# Altium PCB 智慧景区导航.PcbDoc
Units mm, origin at the board's own origin, x right, y up, seen from the top; angles counter-clockwise.
Board outline 94.01 x 87.28 mm, 2 copper layers (Top Layer, Bottom Layer); 20 components, 27 nets, 101 pads, 0 vias.
Unrouted connection lines stored in the file: 52.
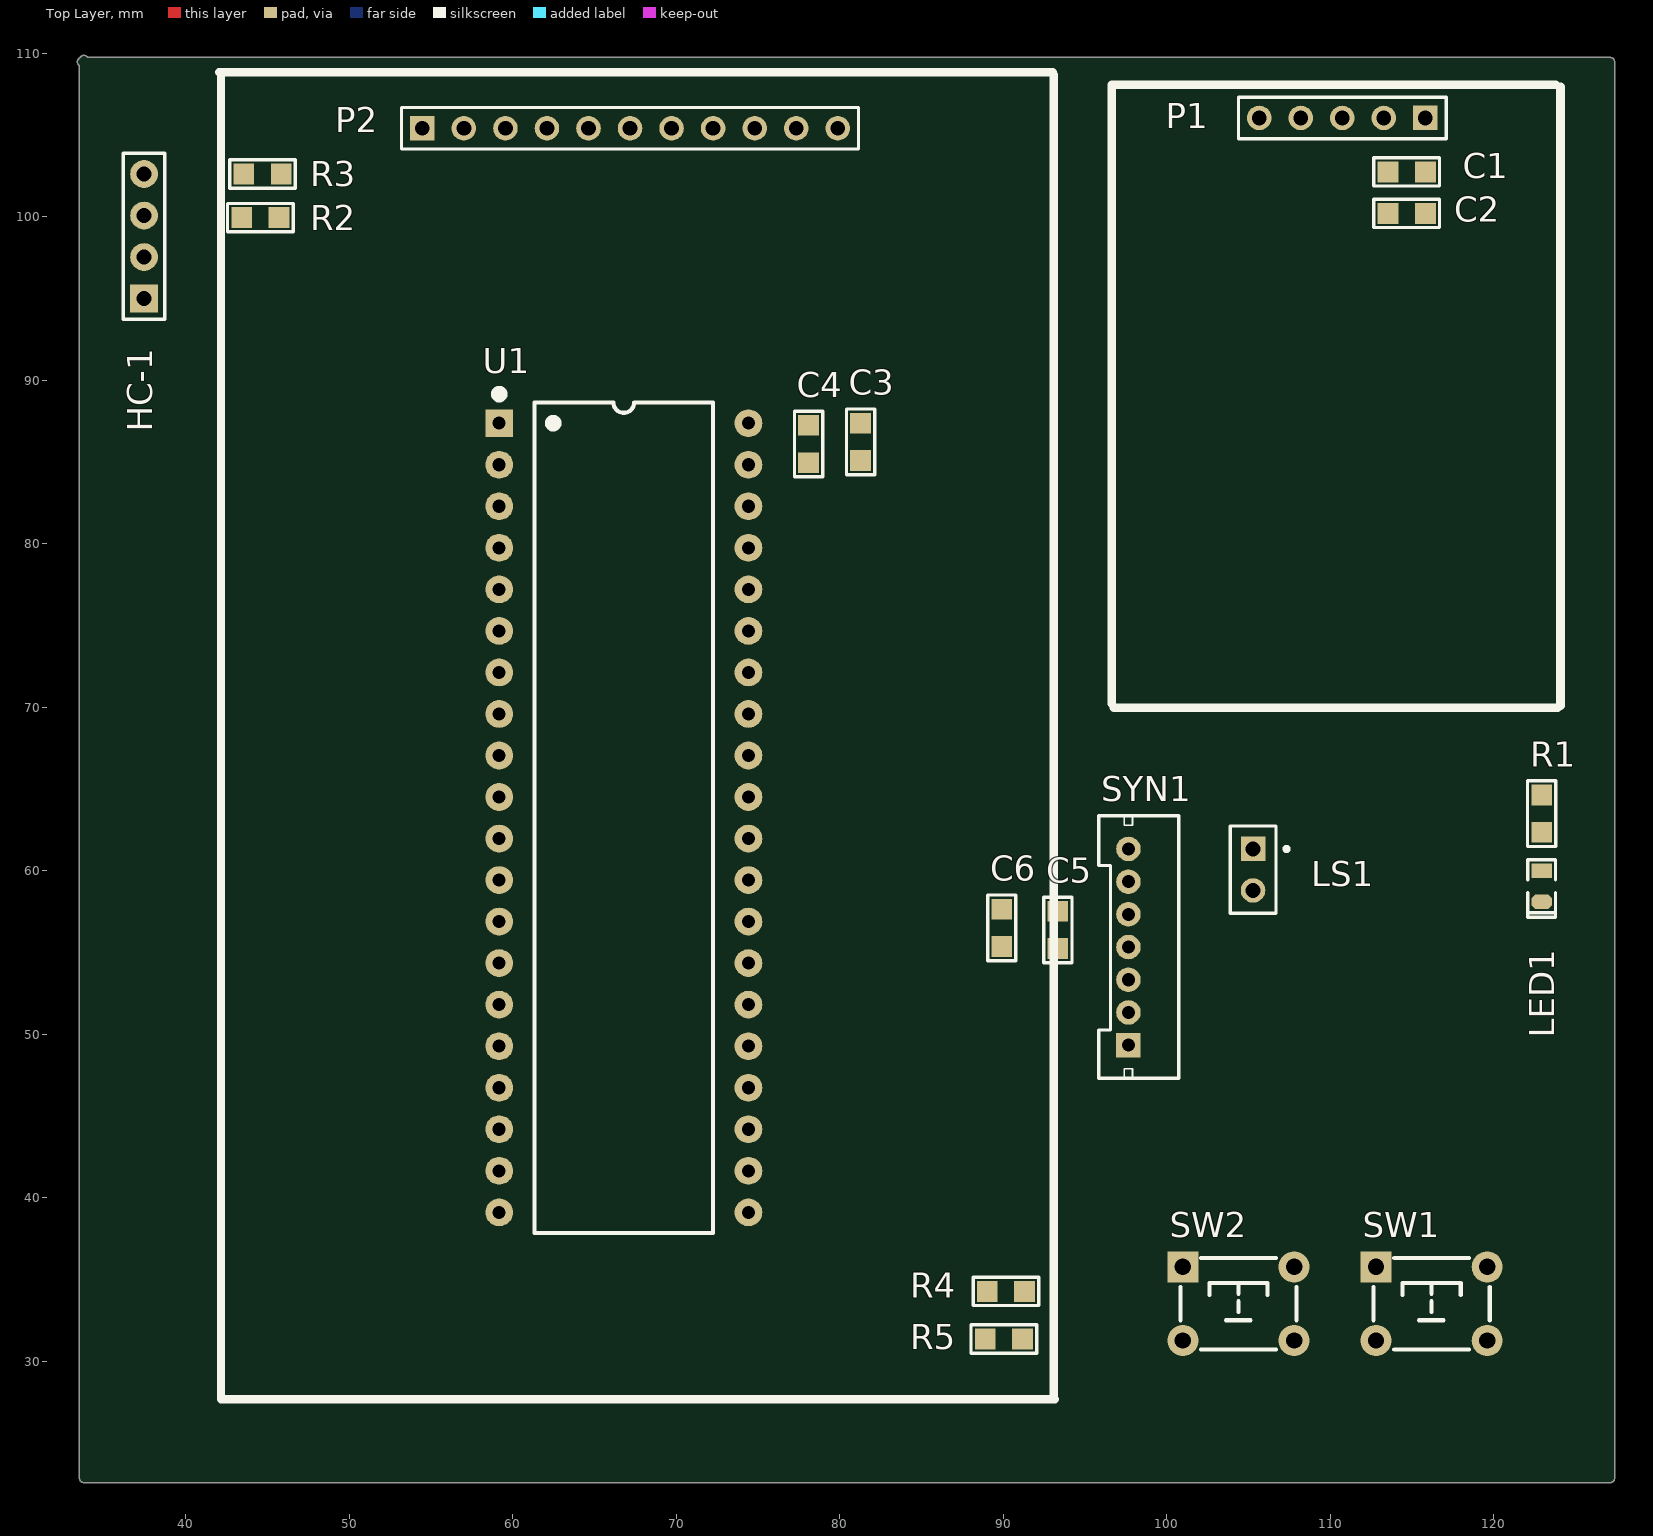
[diagram p0: Top Layer view]
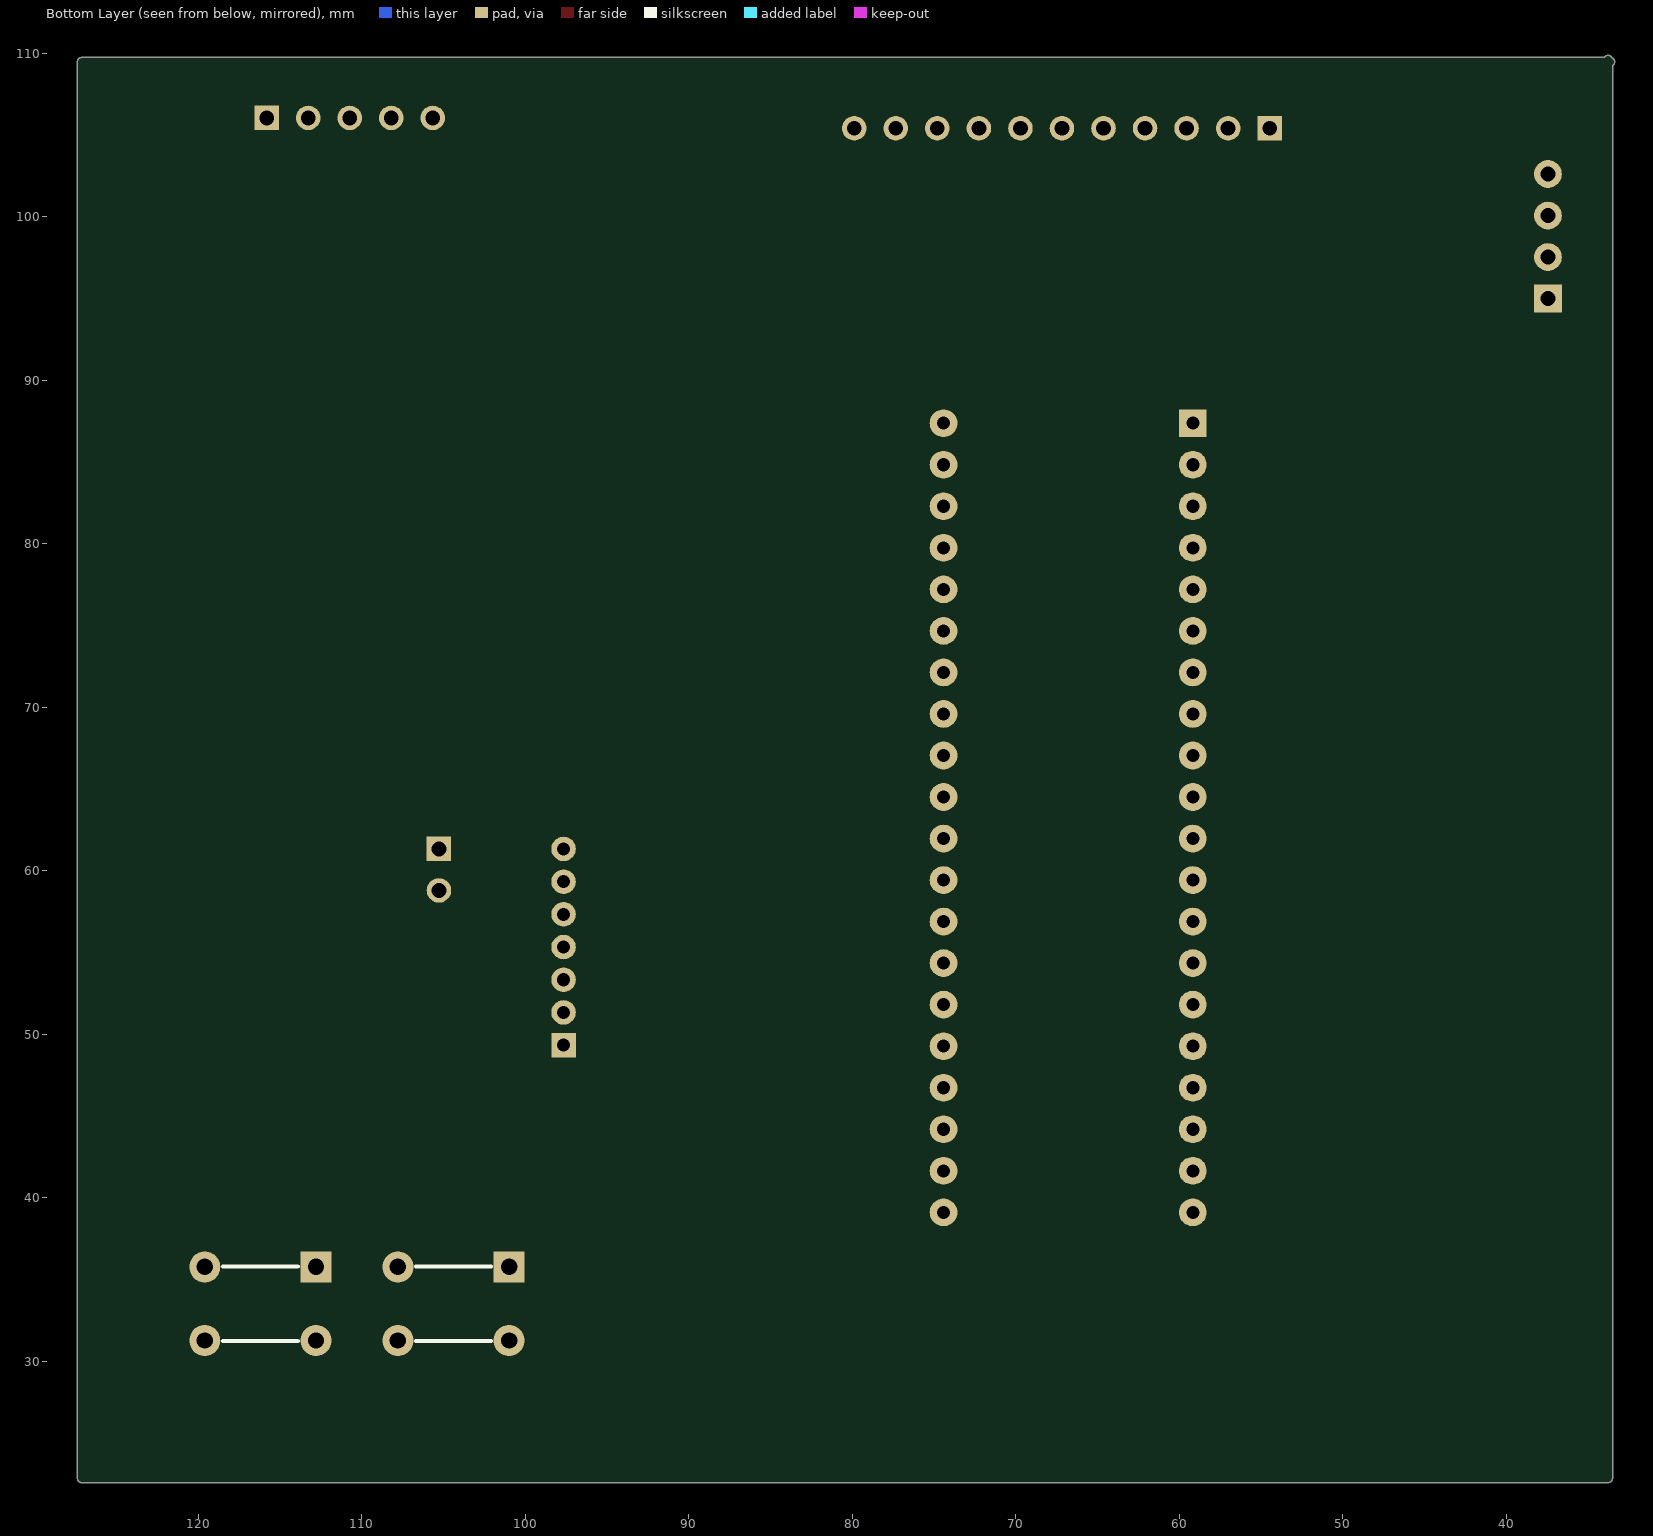
[diagram p1: Bottom Layer view, seen from below]

## Layer stack, top to bottom
Top Solder: solder mask 0.0102, Solder Resist, Dk 3.5
Top Layer: signal copper 0.0356
Dielectric 1: dielectric 0.32, FR-4, Dk 4.8
Bottom Layer: signal copper 0.0356
Bottom Solder: solder mask 0.0102, Solder Resist, Dk 3.5

## Board outline
33.512,22.86 33.512,109.245 cw(c33.655,109.474) 33.538,109.718 cw(c33.782,109.601) 34.011,109.744 127.127,109.744 cw(c127.127,109.474) 127.397,109.474 127.397,22.86 cw(c127.127,22.86) 127.127,22.59 33.782,22.59 cw(c33.782,22.86)

## Design rules (kind name [scope] priority, off if disabled: settings)
Clearance Clearance_GND [InPolygon] p1: gap=0.5 ignorepadtopadclearanceinfootprint=TRUE
Clearance [All] p2: gap=0.203 ignorepadtopadclearanceinfootprint=TRUE
HoleSize [All] p1: absolutevalues=TRUE maxlimit=3.54 minlimit=0.2 maxpercent=80.000 minpercent=20.000
PolygonConnect [All] p1: connectstyle=Relief reliefconductorwidth=0.254 reliefentries=4 polygonreliefangle="90 Angle" airgapwidth=0.254
RoutingVias [All] p1: holewidth=0.711 width=1.27 viastyle="Through Hole" minholewidth=0.711 minwidth=1.27 maxholewidth=0.711 maxwidth=1.27
SolderMaskExpansion [All] p1: expansion=0.102
Width [All] p1: maxlimit=3.54 minlimit=0.5 preferedwidth=0.7
29 further rules are at their usual default settings.

## Components (designator, comment, footprint, x,y, rotation, side; value= is the part's Value field where it differs from the comment)
C1 "10uf" "R 0805_M" 114.681,102.743 r180 top
C2 "103" "R 0805_M" 114.681,100.203 r180 top
C3 "10uf" "R 0805_M" 81.28,86.233 r270 top
C4 "103" "R 0805_M" 78.105,86.106 r270 top
C5 "10uf" "R 0805_M" 93.345,56.388 r270 top
C6 "103" "R 0805_M" 89.916,56.515 r270 top
HC-1 "HDR-1X4" HDR2.54-M-LI-4P 37.465,98.806 r90 top
LED1 "红色" "LED 0805R" 122.936,59.055 r270 top
LS1 "Speaker" PIN2 105.283,61.341 r270 top
P1 "NEO APM" HDR1X5 115.824,106.045 r180 top
P2 "TFT2.8" HDR1X11 54.483,105.41 r0 top
R1 "510R" "R 0805_M" 122.936,63.5 r90 top
R2 "100" "R 0805_M" 44.577,99.949 r0 top
R3 "100" "R 0805_M" 44.704,102.616 r0 top
R4 "10K" "R 0805_M" 90.17,34.282 r180 top
R5 "10K" "R 0805_M" 90.043,31.369 r180 top
SW1 "6x6x5" "TSW DIP-6*6*6" 116.205,33.528 r0 top
SW2 "6x6x5" "TSW DIP-6*6*6" 104.394,33.528 r0 top
SYN1 "HDR-1X7" PH2.0-LI-7P 97.663,55.34 r90 top
U1 "STM32F103C8T6核心板" DIP40-600_MH 66.802,63.246 r0 top

## Footprints (in the part's own frame and the unit in brackets; to place one, negate y for a bottom-side part, rotate by r counter-clockwise, add the part's x,y. Pads: shape width x height; smd on the part's side, far side on the other; paste and mask are expansions set on the pad)
DIP40-600_MH [mm] "带底座 52*15.2*4mm(长宽高)"
  rect 1.7x1.7 hole 0.8: 1(-7.62,24.13)
  round 1.7 hole 0.8: 2(-7.62,21.59) 3(-7.62,19.05) 4(-7.62,16.51) 5(-7.62,13.97) 6(-7.62,11.43) 7(-7.62,8.89) 8(-7.62,6.35) 9(-7.62,3.81) 10(-7.62,1.27) 11(-7.62,-1.27) 12(-7.62,-3.81) 13(-7.62,-6.35) 14(-7.62,-8.89) 15(-7.62,-11.43) 16(-7.62,-13.97) 17(-7.62,-16.51) 18(-7.62,-19.05) 19(-7.62,-21.59) 20(-7.62,-24.13) 21(7.62,-24.13) 22(7.62,-21.59) 23(7.62,-19.05) 24(7.62,-16.51) 25(7.62,-13.97) 26(7.62,-11.43) 27(7.62,-8.89) 28(7.62,-6.35) 29(7.62,-3.81) 30(7.62,-1.27) 31(7.62,1.27) 32(7.62,3.81) 33(7.62,6.35) 34(7.62,8.89) 35(7.62,11.43) 36(7.62,13.97) 37(7.62,16.51) 38(7.62,19.05) 39(7.62,21.59) 40(7.62,24.13)
  silkscreen extent -7.87,-25.4 5.46,26.16, body extent -8.9,-26.18 8.9,26.18, height 8.3
HDR1X5 [mm] "Connector; Header; 5 Position"
  rect 1.5x1.5 hole 0.9: 1(0,0)
  round 1.5 hole 0.9: 2(2.54,0) 3(5.08,0) 4(7.62,0) 5(10.16,0)
  silkscreen extent -1.27,-1.27 11.43,1.27
HDR1X11 [mm] "Connector; Header; 11 Position"
  rect 1.5x1.5 hole 0.9: 1(0,0)
  round 1.5 hole 0.9: 2(2.54,0) 3(5.08,0) 4(7.62,0) 5(10.16,0) 6(12.7,0) 7(15.24,0) 8(17.78,0) 9(20.32,0) 10(22.86,0) 11(25.4,0)
  silkscreen extent -1.27,-1.27 26.67,1.27
HDR2.54-M-LI-4P [mm] "排母，4脚"
  rect 1.7x1.7 hole 0.9: 1(-3.81,0)
  round 1.7 hole 0.9: 2(-1.27,0) 3(1.27,0) 4(3.81,0)
  silkscreen extent -5.08,-1.27 5.08,1.27, body extent -5.08,-1.27 5.08,1.27, height 8.5
"LED 0805R" [mil] "红色0805LED"
  rect 35x50 smd: 1(-37.41,0)
  oct 35x50 smd: 2(37.4,0)
  silkscreen extent -64,-33 75,33, body extent -39,-25 39,25, height 32
PH2.0-LI-7P [mm] "长：15.9mm，宽：4.7mm，高：6mm"
  rect 1.5x1.5 hole 0.8: 1(-6,0)
  round 1.5 hole 0.8: 2(-4,0) 3(-2,0) 4(0,0) 5(2,0) 6(4,0) 7(6,0)
  silkscreen extent -8.03,-3.08 8.03,1.82, body extent -7.95,-3 7.95,1.7, height 6.01
PIN2 [mm] "Photosensitive Diode; 2 Leads"
  rect 1.5x1.5 hole 0.9: 1(0,0)
  round 1.5 hole 0.9: 2(2.54,0)
  silkscreen extent -1.4,-1.4 3.94,2.18
"R 0805_M" [mil] "1/8W贴片电阻"
  rect 50x50 smd: 1(-45.01,-0.01) 2(45,0)
  silkscreen extent -79,-34 79,34, body extent -39,-25 39,25, height 20
"TSW DIP-6*6*6" [mm] "6*6*6mm"
  rect 1.9x1.9 hole 1: 1(-3.4,2.25)
  round 1.9 hole 1: 2(3.4,2.25) 3(-3.4,-2.25) 4(3.4,-2.25)
  silkscreen extent -3.56,-2.79 3.56,2.79, body extent -4.11,-3 4.11,3, height 5.95

## Part data
C1 C2 C3 C4 C5 C6: library part C-CC, "直插瓷片电容"
HC-1: library part "Header 4", "4P接插件"
LED1: library part LED-SMD, "贴片LED", BOM名称=贴片LED, 学习资源=www.ooocke.com, 版权归属=源创客
LS1: "Loudspeaker", LatestRevisionDate=17-Jul-2002, LatestRevisionNote="Re-released for DXP Platform.", PackageReference=PIN2, Published=24-Mar-1999, Publisher="Altium Limited"
P1: library part "Header 5", "Header, 5-Pin", LatestRevisionDate=17-Jul-2002, LatestRevisionNote="Re-released for DXP Platform.", Publisher="Altium Limited"
P2: library part "Header 11", "Header, 11-Pin", LatestRevisionDate=17-Jul-2002, LatestRevisionNote="Re-released for DXP Platform.", Publisher="Altium Limited"
R1 R2 R3 R4 R5: library part R-CRR, "直插色环电阻"
SW1 SW2: library part "TSW DIP-6x6", "直插6x6轻触开关"
SYN1: library part "Header 7", "7P接插件"

## Nets (pads, with @x,y where several pads share a name; then routed paths per layer and width w, separated by ;. In a path a pad name is that pad's centre, name@x,y a point inside that pad or via, vN(x,y) a via of type N, cw(c..) or ccw(c..) an arc to the next point about the centre after c; other vN are vias at no path point)
+3.3: C1.1 C2.1 C3.1 C4.1 P1.1 P2.2 R1.2 R4.2 R5.2 U1.40
+5: C5.1 C6.1 HC-1.1 SYN1.5 U1.38
BUSY: SYN1.1 U1.25
CLK: P2.3 U1.10
CS1: P2.9 U1.6
CS2: P2.10 U1.3
DO: P2.6 U1.5
GND: C1.2 C2.2 C3.2 C4.2 C5.2 C6.2 HC-1.2 P1.2 P2.1 SW1.1 SW1.2 SW2.1 SW2.2 SYN1.4 U1.20 U1.39
MISO: P2.8 U1.11
MOSI: P2.4 U1.12
NetHC-1_3: HC-1.3 R2.1
NetHC-1_4: HC-1.4 R3.1
NetLED1_1: LED1.1 R1.1
NetLED1_2: LED1.2 U1.23
NetLS1_1: LS1.1 SYN1.7
NetLS1_2: LS1.2 SYN1.6
PEN: P2.11 U1.4
PPS: P1.5 U1.36
RES: P2.5 U1.13
RX1: SYN1.3 U1.27
RX2: R2.2 U1.8
RX3: P1.4 U1.16
SW1: R4.1 SW1.4 U1.22
SW2: R5.1 SW2.4 U1.21
TX1: SYN1.2 U1.26
TX2: R3.2 U1.7
TX3: P1.3 U1.15
pads on no net: P2.7 SW1.3 SW2.3 U1.1 U1.2 U1.9 U1.14 U1.17 U1.18 U1.19 U1.24 U1.28 U1.29 U1.30 U1.31 U1.32 U1.33 U1.34 U1.35 U1.37

## Silkscreen, mask and mechanical layers (free items; w line width, h text height)
Top Overlay:
  lines w0.5: 42.037,108.839 93.037,108.839 ; 42.164,27.686 93.164,27.686 ; 42.164,27.813 42.164,108.813 ; 93.091,27.686 93.091,108.686
  lines w0.54: 96.647,70.231 96.647,108.077 123.774,108.077 ; 96.774,69.977 123.901,69.977 ; 124.079,70.104 124.079,107.95
Mechanical 1:
  lines w0.54: 33.655,109.474 127.127,109.474 127.127,22.86 33.782,22.86 33.782,109.601